# EAGLE board damballah_2.54mm_adapter (EAGLE 5.10)
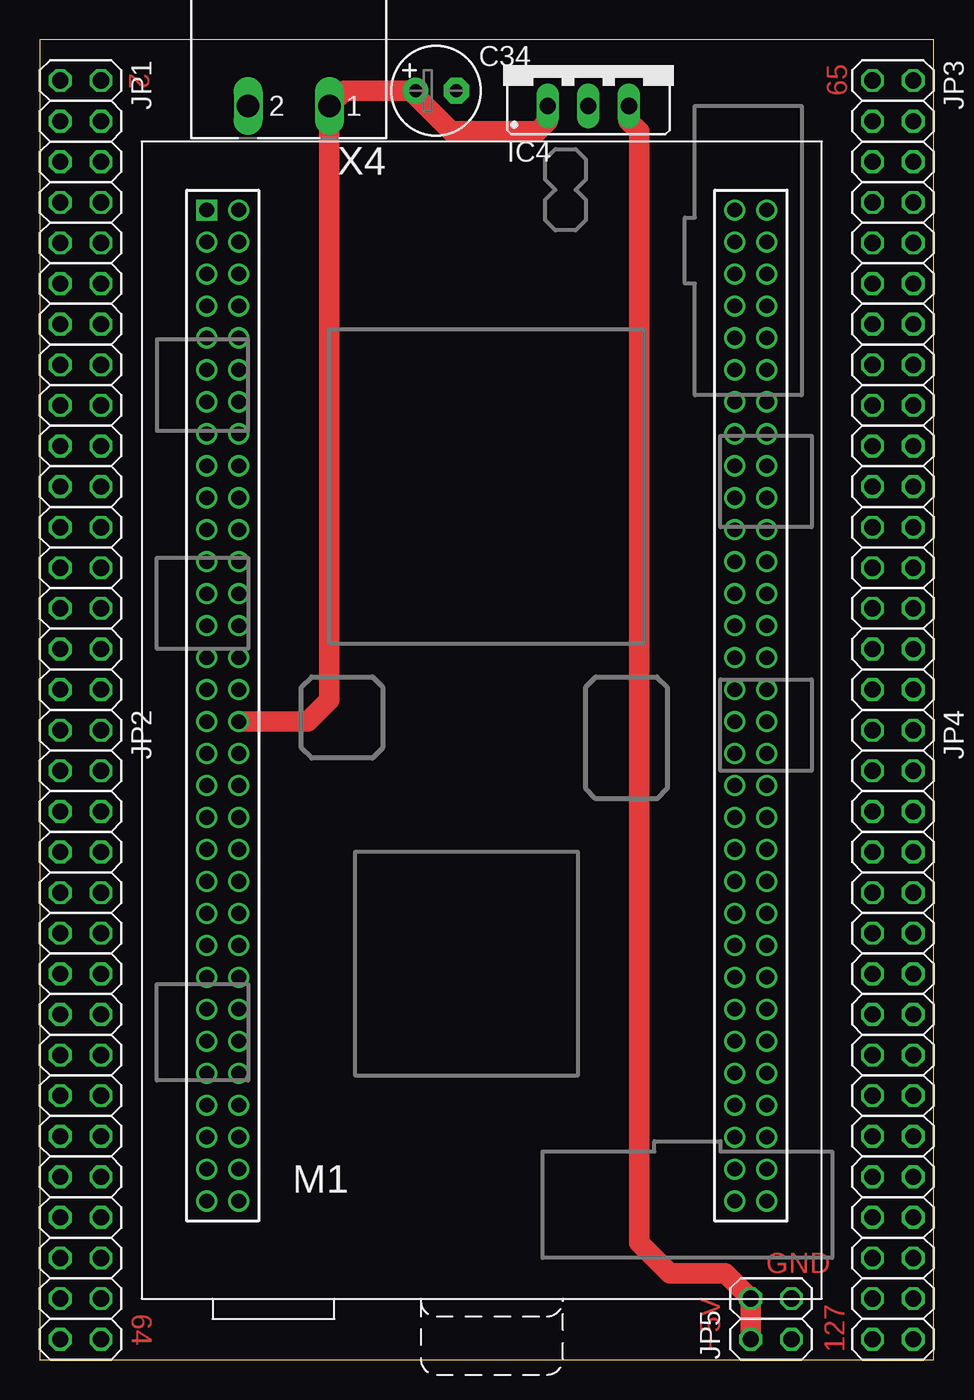
[diagram p0: board, top side]
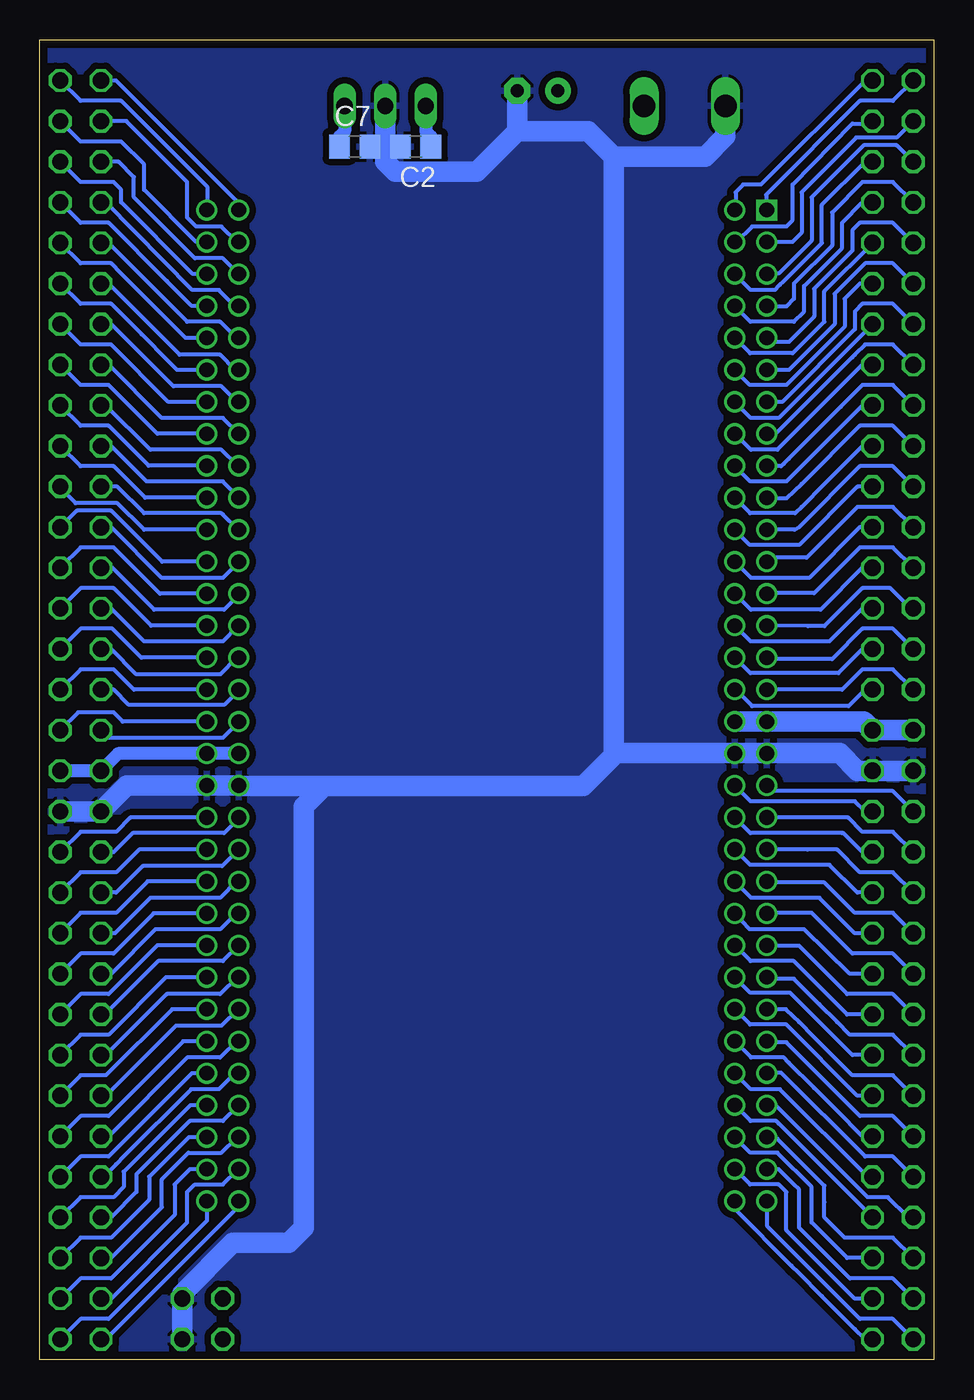
[diagram p1: board, bottom side, seen from below]

Size 55.88 x 82.55 mm. Coordinates in mm from the lower left corner, seen from the top.
Outline: 55.88,0 55.88,82.55 0,82.55 0,0 55.88,0
Copper layers (1*16): Top 0.035mm / dielectric 1.5mm / Bottom 0.035mm
Design rules "PCB-POOL": minimum track width 6mil, minimum drill 12mil, track to track 6mil, track to pad 6mil, pad to pad 6mil, via to via 6mil, smd to smd 6mil, copper to edge 20mil, drill to drill 8mil, minimum pad ring 8mil, minimum via ring 6mil, stop-mask expansion 3mil, vias tented up to drill 0mil, thermal gap 8mil

## Footprints (pad centres in the part's own frame; a part is rotated, then mirrored left to right if it is on the bottom)
C0805 = smd 1.3 x 1.5: 1 -0.95,0; 2 0.95,0
E2,5-6 = drill 0.813 pad 1.6 round: + -1.27,0 | drill 0.813 pad 1.6 octagon: - 1.27,0
78XXS = drill 1.016 long: GND 0,-2.54; IN -2.54,-2.54; OUT 2.54,-2.54
2X16 = drill 1.016 octagon: 1 -19.05,-1.27; 2 -19.05,1.27; 3 -16.51,-1.27; 4 -16.51,1.27; 5 -13.97,-1.27; 6 -13.97,1.27; 7 -11.43,-1.27; 8 -11.43,1.27; 9 -8.89,-1.27; 10 -8.89,1.27; 11 -6.35,-1.27; 12 -6.35,1.27; 13 -3.81,-1.27; 14 -3.81,1.27; 15 -1.27,-1.27; 16 -1.27,1.27; 17 1.27,-1.27; 18 1.27,1.27; 19 3.81,-1.27; 20 3.81,1.27; 21 6.35,-1.27; 22 6.35,1.27; 23 8.89,-1.27; 24 8.89,1.27; 25 11.43,-1.27; 26 11.43,1.27; 27 13.97,-1.27; 28 13.97,1.27; 29 16.51,-1.27; 30 16.51,1.27; 31 19.05,-1.27; 32 19.05,1.27
2X02 = drill 1.016 octagon: 1 -1.27,-1.27; 2 -1.27,1.27; 3 1.27,-1.27; 4 1.27,1.27
CONTROL = drill 0.914 square: 1 4.08,68.1 | drill 0.914 round: 2 6.08,68.1; 3 4.08,66.1; 4 6.08,66.1; 5 4.08,64.1; 6 6.08,64.1; 7 4.08,62.1; 8 6.08,62.1; 9 4.08,60.1; 10 6.08,60.1; 11 4.08,58.1; 12 6.08,58.1; 13 4.08,56.1; 14 6.08,56.1; 15 4.08,54.1; 16 6.08,54.1; 17 4.08,52.1; 18 6.08,52.1; 19 4.08,50.1; 20 6.08,50.1; 21 4.08,48.1; 22 6.08,48.1; 23 4.08,46.1; 24 6.08,46.1; 25 4.08,44.1; 26 6.08,44.1; 27 4.08,42.1; 28 6.08,42.1; 29 4.08,40.1; 30 6.08,40.1; 31 4.08,38.1; 32 6.08,38.1; 33 4.08,36.1; 34 6.08,36.1; 35 4.08,34.1; 36 6.08,34.1; 37 4.08,32.1; 38 6.08,32.1; 39 4.08,30.1; 40 6.08,30.1; 41 4.08,28.1; 42 6.08,28.1; 43 4.08,26.1; 44 6.08,26.1; 45 4.08,24.1; 46 6.08,24.1; 47 4.08,22.1; 48 6.08,22.1; 49 4.08,20.1; 50 6.08,20.1; 51 4.08,18.1; 52 6.08,18.1; 53 4.08,16.1; 54 6.08,16.1; 55 4.08,14.1; 56 6.08,14.1; 57 4.08,12.1; 58 6.08,12.1; 59 4.08,10.1; 60 6.08,10.1; 61 4.08,8.1; 62 6.08,8.1; 63 4.08,6.1; 64 6.08,6.1; 65 37.1,68.1; 66 39.1,68.1; 67 37.1,66.1; 68 39.1,66.1; 69 37.1,64.1; 70 39.1,64.1; 71 37.1,62.1; 72 39.1,62.1; 73 37.1,60.1; 74 39.1,60.1; 75 37.1,58.1; 76 39.1,58.1; 77 37.1,56.1; 78 39.1,56.1; 79 37.1,54.1; 80 39.1,54.1; 81 37.1,52.1; 82 39.1,52.1; 83 37.1,50.1; 84 39.1,50.1; 85 37.1,48.1; 86 39.1,48.1; 87 37.1,46.1; 88 39.1,46.1; 89 37.1,44.1; 90 39.1,44.1; 91 37.1,42.1; 92 39.1,42.1; 93 37.1,40.1; 94 39.1,40.1; 95 37.1,38.1; 96 39.1,38.1; 97 37.1,36.1; 98 39.1,36.1; 99 37.1,34.1; 100 39.1,34.1; 101 37.1,32.1; 102 39.1,32.1; 103 37.1,30.1; 104 39.1,30.1; 105 37.1,28.1; 106 39.1,28.1; 107 37.1,26.1; 108 39.1,26.1; 109 37.1,24.1; 110 39.1,24.1; 111 37.1,22.1; 112 39.1,22.1; 113 37.1,20.1; 114 39.1,20.1; 115 37.1,18.1; 116 39.1,18.1; 117 37.1,16.1; 118 39.1,16.1; 119 37.1,14.1; 120 39.1,14.1; 121 37.1,12.1; 122 39.1,12.1; 123 37.1,10.1; 124 39.1,10.1; 125 37.1,8.1; 126 39.1,8.1; 127 37.1,6.1; 128 39.1,6.1
MSTBA2 = drill 1.397 long: 1 -2.54,5.08; 2 2.54,5.08

## Placement (x,y rotation side)
C2  100n  [C0805]  32.38,75.88 180 bottom
C7  100n  [C0805]  36.2,75.88 0 bottom
C34  22µ  [E2,5-6]  24.77,79.38 0 top
IC4  7805  [78XXS]  34.29,80.96 0 top
JP1  [2X16]  2.54,60.96 270 top
JP2  [2X16]  2.54,20.32 270 top
JP3  [2X16]  53.34,60.96 270 top
JP4  [2X16]  53.34,20.32 270 top
JP5  [2X02]  45.72,2.54 90 top
M1  DAMBALLAH  [CONTROL]  6.35,3.81 0 top
X4  MSTBA2  [MSTBA2]  15.56,83.5 180 top

## Library data of the parts
C2 C7 C34 = rcl
IC4 = v-reg
JP1-JP5 = pinhead2
M1 = loa
X4 = con-phoenix-508

## Nets
+5V: C7.1 IC4.OUT JP5.2 JP5.4
GND: C2.2 C7.2 C34.- IC4.GND JP2.3 JP2.4 JP4.5 JP4.6 JP5.1 JP5.3 M1.35 M1.36 M1.101 M1.102 X4.2
N$1: JP1.1 M1.1
N$2: JP1.2 M1.2
N$3: JP1.3 M1.3
N$4: JP1.4 M1.4
N$5: JP1.5 M1.5
N$6: JP1.6 M1.6
N$7: JP1.7 M1.7
N$8: JP1.8 M1.8
N$9: JP1.9 M1.9
N$10: JP1.10 M1.10
N$11: JP1.11 M1.11
N$12: JP1.12 M1.12
N$13: JP1.13 M1.13
N$14: JP1.14 M1.14
N$15: JP1.15 M1.15
N$16: JP1.16 M1.16
N$17: JP1.17 M1.17
N$18: JP1.18 M1.18
N$19: JP1.19 M1.19
N$20: JP1.20 M1.20
N$21: JP1.21 M1.21
N$22: JP1.22 M1.22
N$23: JP1.23 M1.23
N$24: JP1.24 M1.24
N$25: JP1.25 M1.25
N$26: JP1.26 M1.26
N$27: JP1.27 M1.27
N$28: JP1.28 M1.28
N$29: JP1.29 M1.29
N$30: JP1.30 M1.30
N$31: JP1.31 M1.31
N$32: JP1.32 M1.32
N$37: JP2.5 M1.37
N$38: JP2.6 M1.38
N$39: JP2.7 M1.39
N$40: JP2.9 M1.41
N$41: JP2.11 M1.43
N$42: JP2.13 M1.45
N$43: JP2.15 M1.47
N$44: JP2.17 M1.49
N$45: JP2.8 M1.40
N$46: JP2.10 M1.42
N$47: JP2.12 M1.44
N$48: JP2.14 M1.46
N$49: JP2.16 M1.48
N$50: JP2.18 M1.50
N$51: JP2.19 M1.51
N$52: JP2.20 M1.52
N$53: JP2.21 M1.53
N$54: JP2.22 M1.54
N$55: JP2.23 M1.55
N$56: JP2.24 M1.56
N$57: JP2.25 M1.57
N$58: JP2.26 M1.58
N$59: JP2.27 M1.59
N$60: JP2.28 M1.60
N$61: JP2.29 M1.61
N$62: JP2.30 M1.62
N$63: JP2.31 M1.63
N$64: JP2.32 M1.64
N$65: JP3.1 M1.65
N$66: JP3.2 M1.66
N$67: JP3.3 M1.67
N$68: JP3.4 M1.68
N$69: JP3.5 M1.69
N$70: JP3.6 M1.70
N$71: JP3.7 M1.71
N$72: JP3.8 M1.72
N$73: JP3.9 M1.73
N$74: JP3.10 M1.74
N$75: JP3.11 M1.75
N$76: JP3.12 M1.76
N$77: JP3.13 M1.77
N$78: JP3.14 M1.78
N$79: JP3.15 M1.79
N$80: JP3.16 M1.80
N$81: JP3.17 M1.81
N$82: JP3.18 M1.82
N$83: JP3.19 M1.83
N$84: JP3.20 M1.84
N$85: JP3.21 M1.85
N$86: JP3.22 M1.86
N$87: JP3.23 M1.87
N$88: JP3.24 M1.88
N$89: JP3.25 M1.89
N$90: JP3.26 M1.90
N$91: JP3.27 M1.91
N$92: JP3.28 M1.92
N$93: JP3.29 M1.93
N$94: JP3.30 M1.94
N$95: JP3.31 M1.95
N$96: JP3.32 M1.96
N$97: JP4.1 M1.97
N$98: JP4.2 M1.98
N$99: JP4.3 JP4.4 M1.99 M1.100
N$103: JP4.7 M1.103
N$104: JP4.8 M1.104
N$105: JP4.10 M1.106
N$106: JP4.11 M1.107
N$107: JP4.12 M1.108
N$108: JP4.13 M1.109
N$109: JP4.14 M1.110
N$110: JP4.15 M1.111
N$111: JP4.16 M1.112
N$112: JP4.17 M1.113
N$113: JP4.18 M1.114
N$114: JP4.19 M1.115
N$115: JP4.20 M1.116
N$116: JP4.21 M1.117
N$117: JP4.22 M1.118
N$118: JP4.23 M1.119
N$119: JP4.24 M1.120
N$120: JP4.25 M1.121
N$121: JP4.26 M1.122
N$122: JP4.27 M1.123
N$123: JP4.28 M1.124
N$124: JP4.29 M1.125
N$125: JP4.30 M1.126
N$126: JP4.31 M1.127
N$127: JP4.32 M1.128
N$128: JP4.9 M1.105
VCC: C2.1 C34.+ IC4.IN JP2.1 JP2.2 M1.33 M1.34 X4.1

## Tracks (layer width: path | path; a pad name or v marks a point on that pad's centre or on a via)
+5V
  Top 1.27: JP5.2 JP5.4 42.86,5.4 39.37,5.4 37.47,7.3 37.47,76.83 36.83,77.47 IC4.OUT
  Bottom 0.813: IC4.OUT 36.83,76.83 37.15,76.52 C7.1
GND
  Bottom 0.813: C2.2 34.29,75.88 C7.2 | 10.4,37.94 M1.35 10.45,37.91 10.48,37.94 | 12.4,37.94 M1.36 12.51,37.91 12.54,37.94 | 20,37.94 20,37.78 | 43.42,35.88 M1.101
  Bottom 1.27: IC4.GND 34.29,75.88 34.29,74.93 33.66,74.3 28.57,74.3 26.04,76.83 | X4.2 13.02,76.52 14.29,75.25 20,75.25 | 20,75.25 21.59,76.83 26.04,76.83 | JP2.3 JP2.4 4.76,36.83 5.87,37.94 10.4,37.94 | 10.48,37.94 12.4,37.94 | 12.54,37.94 20,37.94 20,75.25 | M1.101 M1.102 50.45,35.91 JP4.5 JP4.6 | 20,37.78 21.91,35.88 38.1,35.88 | 38.1,35.88 43.42,35.88 | JP5.1 JP5.3 46.99,4.13 43.81,7.3 40.32,7.3 39.37,8.26 39.37,34.61 38.1,35.88 | 26.04,76.83 C34.-
  pour Bottom (isolate 0.406): -1.27,83.82 57.15,83.82 57.15,-1.27 -1.27,-1.27
N$1
  Bottom 0.254: JP1.1 2.54,78.74 4.6,78.74 10.48,72.87 10.48,72.02 M1.1
N$2
  Bottom 0.254: JP1.2 4.29,80.01 10.79,73.5 11.91,73.5 12.38,73.03 12.38,71.96 M1.2
N$3
  Bottom 0.254: M1.3 8.83,69.91 8.26,70.48 8.26,73.03 4.84,76.44 2.3,76.44 JP1.3
N$4
  Bottom 0.254: M1.4 12.32,69.91 11.35,70.88 9.21,70.88 8.81,71.28 8.81,73.5 5.08,77.31 3.97,77.31 JP1.4
N$5
  Bottom 0.254: JP1.5 2.3,75.96 4.37,75.96 7.62,72.71 7.62,70.01 9.68,67.94 10.39,67.94 M1.5
N$6
  Bottom 0.254: JP1.6 4.29,74.93 6.99,72.23 6.99,69.85 9.37,67.47 9.6,67.23 9.92,66.91 11.43,66.91 M1.6
N$7
  Bottom 0.254: JP1.7 2.54,73.66 4.45,73.66 6.35,71.75 6.35,69.69 8.73,67.31 8.73,66.36 9.21,65.88 10.4,65.88 M1.7
N$8
  Bottom 0.254: JP1.8 4.45,72.39 5.71,71.12 5.71,69.53 8.1,67.15 8.1,65.56 8.73,64.93 11.45,64.93 M1.8
N$9
  Bottom 0.254: JP1.9 2.54,71.12 4.6,71.12 5.08,70.64 5.08,69.37 7.46,66.99 7.46,65.25 9.05,63.66 10.18,63.66 M1.9
N$10
  Bottom 0.254: JP1.10 | JP1.10 6.83,66.83 6.83,64.93 8.73,63.02 | 8.73,63.02 | 8.73,63.02 8.81,62.94 11.46,62.94 M1.10
N$11
  Bottom 0.254: JP1.11 2.54,68.58 4.29,68.58 6.19,66.67 6.19,64.77 9.05,61.91 M1.11
N$12
  Bottom 0.254: JP1.12 4.6,67.31 5.56,66.36 5.56,64.61 9.21,60.96 11.48,60.96 M1.12
N$13
  Bottom 0.254: JP1.13 2.54,66.04 4.45,66.04 4.92,65.56 4.92,64.45 9.46,59.91 M1.13
N$14
  Bottom 0.254: JP1.14 5.71,62.87 | 5.71,62.87 | 5.71,62.87 9.68,58.9 11.42,58.9 M1.14
N$15
  Bottom 0.254: JP1.15 2.54,63.5 4.29,63.5 4.92,62.87 5.08,62.71 9.88,57.91 M1.15
N$16
  Bottom 0.254: M1.16 11.43,56.91 9.76,56.91 4.45,62.23 JP1.16 | JP1.16
N$17
  Bottom 0.254: JP1.17 2.54,60.96 4.45,60.96 5.79,59.61 9.05,56.36 9.37,56.04 9.53,55.88 10.48,55.88 M1.17
N$18
  Bottom 0.254: JP1.18 4.45,59.69 9.21,54.93 11.45,54.93 M1.18
N$19
  Bottom 0.254: JP1.19 2.54,58.42 4.6,58.42 8.26,54.77 9.21,53.86 10.37,53.86 10.48,53.98 M1.19
N$20
  Bottom 0.254: JP1.20 4.45,57.15 6.83,54.77 8.26,53.34 8.65,52.94 11.46,52.94 M1.20
N$21
  Bottom 0.254: JP1.21 2.54,55.88 4.6,55.88 8.41,52.07 8.68,51.91 M1.21
N$22
  Bottom 0.254: JP1.22 4.76,54.61 8.41,50.96 11.48,50.96 M1.22
N$23
  Bottom 0.254: JP1.23 2.54,53.34 4.76,53.34 7.94,50.16 10.32,50.16 10.48,50.01 M1.23
N$24
  Bottom 0.254: JP1.24 4.6,52.07 7.78,48.9 11.41,48.9 M1.24
N$25
  Bottom 0.254: JP1.25 2.54,50.8 4.6,50.8 7.46,47.94 10.48,47.94 M1.25
N$26
  Bottom 0.254: JP1.26 4.45,49.53 7.06,46.91 11.43,46.91 M1.26
N$27
  Bottom 0.254: JP1.27 1.43,46.99 2.7,48.26 4.45,48.26 6.83,45.88 7.86,45.88 M1.27
N$28
  Bottom 0.254: JP1.28 4.45,46.99 6.51,44.93 11.45,44.93 M1.28
N$29
  Bottom 0.254: JP1.29 2.54,45.72 4.45,45.72 6.35,43.81 10.32,43.81 M1.29
N$30
  Bottom 0.254: JP1.30 4.45,44.45 5.95,42.94 11.46,42.94 M1.30
N$31
  Bottom 0.254: JP1.31 2.54,43.18 4.45,43.18 5.71,41.91 M1.31
N$32
  Bottom 0.254: M1.32 12.38,41.91 11.35,40.88 5.32,40.88 4.29,41.91 JP1.32
N$37
  Bottom 0.254: JP2.5 2.54,35.56 10.16,35.56 10.48,35.88 M1.37
N$38
  Bottom 0.254: JP2.6 4.29,34.29 4.92,34.92 11.45,34.92 M1.38
N$39
  Bottom 0.254: M1.39 5.33,33.91 4.45,33.02 2.54,33.02 JP2.7
N$40
  Bottom 0.254: JP2.9 2.54,30.48 4.6,30.48 6.03,31.91 7.89,31.91 M1.41
N$41
  Bottom 0.254: JP2.11 2.54,27.94 4.92,27.94 6.83,29.84 10.48,29.84 M1.43
N$42
  Bottom 0.254: JP2.13 2.54,25.4 5.08,25.4 7.62,27.94 10.48,27.94 M1.45
N$43
  Bottom 0.254: JP2.15 2.54,22.86 5.4,22.86 8.41,25.88 10.32,25.88 M1.47
N$44
  Bottom 0.254: JP2.17 2.54,20.32 5.24,20.32 6.03,21.11 7.14,22.23 8.57,23.65 8.73,23.81 10.32,23.81 M1.49
N$45
  Bottom 0.254: JP2.8 4.45,31.75 5.64,32.94 5.71,32.94 | 5.71,32.94 | 5.71,32.94 11.46,32.94 M1.40
N$46
  Bottom 0.254: JP2.10 4.76,29.21 6.51,30.96 11.48,30.96 M1.42
N$47
  Bottom 0.254: JP2.12 4.92,26.67 7.14,28.89 11.41,28.89 M1.44
N$48
  Bottom 0.254: JP2.14 5.24,24.13 8.1,26.91 11.51,26.91 M1.46
N$49
  Bottom 0.254: JP2.16 5.4,21.59 8.73,24.92 11.44,24.92 M1.48
N$50
  Bottom 0.254: JP2.18 5.08,19.05 8.97,22.94 11.46,22.94 M1.50
N$51
  Bottom 0.254: JP2.19 2.54,17.78 5.08,17.78 5.87,18.57 6.43,19.13 7.46,20.16 8.41,21.11 8.73,21.43 9.24,21.91 M1.51
N$52
  Bottom 0.254: JP2.20 4.76,16.51 9.21,20.95 11.47,20.95 M1.52
N$53
  Bottom 0.254: JP2.21 2.54,15.24 4.6,15.24 9.21,19.84 10.48,19.84 M1.53
N$54
  Bottom 0.254: JP2.22 4.45,13.97 6.03,15.56 6.19,15.72 7.46,16.99 9.05,18.57 9.37,18.89 11.41,18.89 M1.54
N$55
  Bottom 0.254: JP2.23 2.54,12.7 4.29,12.7 9.53,17.94 10.4,17.94 M1.55
N$56
  Bottom 0.254: JP2.24 4.13,11.43 9.6,16.91 11.43,16.91 M1.56
N$57
  Bottom 0.254: JP2.25 1.59,8.89 2.86,10.16 4.13,10.16 9.84,15.88 10.39,15.88 M1.57
N$58
  Bottom 0.254: JP2.26 9.68,14.76 | 9.68,14.76 | 9.68,14.76 9.84,14.92 11.44,14.92 M1.58
N$59
  Bottom 0.254: JP2.27 2.54,7.62 5.56,7.62 6.83,8.89 6.83,9.84 6.83,10.88 9.76,13.81 10.33,13.81 M1.59
N$60
  Bottom 0.254: JP2.28 5.4,6.35 7.62,8.57 7.62,10.79 9.76,12.94 11.46,12.94 M1.60
N$61
  Bottom 0.254: JP2.29 2.54,5.08 5.24,5.08 8.41,8.26 8.41,10.64 8.73,10.95 9.68,11.91 M1.61
N$62
  Bottom 0.254: JP2.30 4.92,3.81 9.21,8.1 9.21,10.48 9.68,10.95 11.47,10.95 M1.62
N$63
  Bottom 0.254: JP2.31 2.54,2.54 4.6,2.54 10.4,8.33 10.4,9.92 10.32,10.08 10.32,10 10.34,10 M1.63
N$64
  Bottom 0.254: JP2.32 4.29,1.27 4.92,1.91 6.99,3.97 8.41,5.4 8.89,5.87 12.38,9.37 12.38,9.86 M1.64
N$65
  Bottom 0.254: M1.65 43.49,71.91 43.5,72.39 51.12,80.01 JP3.1
N$66
  Bottom 0.254: M1.66 45.56,71.91 45.4,72.08 45.4,73.34 46.51,74.45 48.58,76.52 50.8,78.74 53.34,78.74 JP3.2
N$67
  Bottom 0.254: M1.67 43.56,69.91 44.53,70.88 46.12,70.88 46.67,71.44 46.67,73.66 50.48,77.47 JP3.3
N$68
  Bottom 0.254: M1.68 46.1,69.91 49.37,73.18 49.37,74.77 50.8,76.2 53.34,76.2 JP3.4
N$69
  Bottom 0.254: M1.69 43.46,67.91 44.45,68.9 46.2,68.9 50.01,72.71 50.01,73.98 50.96,74.93 JP3.5
N$70
  Bottom 0.254: M1.70 46.32,67.91 50.8,72.39 50.8,73.18 51.28,73.66 53.34,73.66 JP3.6
N$71
  Bottom 0.254: M1.71 43.69,65.91 44.69,66.91 46.35,66.91 51.75,72.39 JP3.7 | JP3.7
N$72
  Bottom 0.254: M1.72 46.38,65.91 47.94,67.47 51.59,71.12 53.34,71.12 JP3.8
N$73
  Bottom 0.254: M1.73 43.59,63.91 44.61,64.93 46.67,64.93 48.9,67.15 50.16,68.42 51.59,69.85 JP3.9
N$74
  Bottom 0.254: M1.74 46.77,63.91 49.85,66.99 50.8,67.94 51.44,68.58 53.34,68.58 JP3.10
N$75
  Bottom 0.254: M1.75 43.65,61.91 44.61,62.87 47.15,62.87 51.59,67.31 JP3.11
N$76
  Bottom 0.254: M1.76 47.3,61.91 47.78,62.39 49.53,64.14 51.44,66.04 53.34,66.04 JP3.12
N$77
  Bottom 0.254: M1.77 43.56,59.91 44.45,60.8 | 44.45,60.8 | 44.45,60.8 44.53,60.88 47.55,60.88 51.44,64.77 JP3.13
N$78
  Bottom 0.254: M1.78 47.84,59.91 51.44,63.5 53.34,63.5 JP3.14
N$79
  Bottom 0.254: M1.79 43.46,57.91 44.45,58.9 48.26,58.9 51.59,62.23 JP3.15
N$80
  Bottom 0.254: M1.80 48.54,57.91 51.59,60.96 53.34,60.96 JP3.16
N$81
  Bottom 0.254: M1.81 43.53,55.91 44.53,56.91 48.97,56.91 51.75,59.69 JP3.17
N$82
  Bottom 0.254: M1.82 49.08,55.91 51.59,58.42 53.34,58.42 JP3.18
N$83
  Bottom 0.254: M1.83 43.45,53.93 44.45,54.93 49.21,54.93 51.44,57.15 JP3.19
N$84
  Bottom 0.254: M1.84 49.31,53.91 51.28,55.88 53.34,55.88 JP3.20
N$85
  Bottom 0.254: M1.85 43.5,51.91 44.45,52.86 | 44.45,52.86 | 44.45,52.86 44.53,52.94 49.37,52.94 51.04,54.61 JP3.21
N$86
  Bottom 0.254: M1.86 49.37,51.91 51.04,53.58 53.66,53.58 54.61,54.53 JP3.22
N$87
  Bottom 0.254: M1.87 43.45,49.9 44.45,48.9 48.26,48.9 51.44,52.07 JP3.23
N$88
  Bottom 0.254: M1.88 48.24,49.91 51.44,53.1 53.58,53.1 JP3.24
N$89
  Bottom 0.254: M1.89 43.45,47.83 44.29,46.99 | 44.29,46.99 | 44.29,46.99 44.37,46.91 48.74,46.91 51.36,49.53 JP3.25
N$90
  Bottom 0.254: M1.90 48.39,47.91 51.28,50.8 53.34,50.8 JP3.26
N$91
  Bottom 0.254: M1.91 43.47,45.91 44.45,44.93 49.37,44.93 51.44,46.99 JP3.27
N$92
  Bottom 0.254: M1.92 48.93,45.91 51.28,48.26 53.34,48.26 JP3.28
N$93
  Bottom 0.254: M1.93 43.56,43.91 44.61,42.86 49.85,42.86 51.44,44.45 JP3.29
N$94
  Bottom 0.254: M1.94 49.55,43.91 51.36,45.72 53.34,45.72 JP3.30
N$95
  Bottom 0.254: M1.95 43.45,41.88 44.37,40.96 50.32,40.96 51.28,41.91 JP3.31
N$96
  Bottom 0.254: M1.96 50.01,41.91 51.12,43.02 51.28,43.18 53.34,43.18 JP3.32
N$97
  Bottom 0.254: M1.97 43.45,39.89 44.45,38.89 51.59,38.89 JP4.1
N$98
  Bottom 0.254: M1.98 50.7,39.91 51.28,40.48 53.5,40.48 JP4.2
N$99
  Bottom 0.813: M1.99 M1.100 50.99,37.91 JP4.3 JP4.4
N$103
  Bottom 0.254: M1.103 43.45,33.86 44.29,33.02 | 44.29,33.02 | 44.29,33.02 44.37,32.94 50.09,32.94 51.28,31.75 JP4.7
N$104
  Bottom 0.254: M1.104 50.23,33.91 51.12,33.02 53.34,33.02 JP4.8
N$105
  Bottom 0.254: M1.106 49.69,31.91 51.12,30.48 53.34,30.48 JP4.10
N$106
  Bottom 0.254: M1.107 43.59,29.91 44.61,28.89 48.97,28.89 51.2,26.67 JP4.11
N$107
  Bottom 0.254: M1.108 49.15,29.91 51.12,27.94 53.34,27.94 JP4.12
N$108
  Bottom 0.254: M1.109 43.61,27.91 44.61,26.91 48.66,26.91 51.44,24.13 JP4.13
N$109
  Bottom 0.254: M1.110 48.77,27.91 51.28,25.4 53.34,25.4 JP4.14
N$110
  Bottom 0.254: M1.111 43.46,25.91 44.45,24.92 48.5,24.92 48.66,24.77 51.83,21.59 JP4.15
N$111
  Bottom 0.254: M1.112 48.54,25.91 51.59,22.86 53.34,22.86 JP4.16
N$112
  Bottom 0.254: M1.113 43.56,23.91 44.61,22.86 47.94,22.86 51.75,19.05 JP4.17
N$113
  Bottom 0.254: M1.114 48,23.91 51.59,20.32 53.34,20.32 JP4.18
N$114
  Bottom 0.254: M1.115 43.49,21.91 44.53,20.88 47.39,20.88 51.75,16.51 JP4.19
N$115
  Bottom 0.254: M1.116 47.62,21.91 51.75,17.78 53.34,17.78 JP4.20
N$116
  Bottom 0.254: M1.117 43.59,19.91 44.53,18.97 | 44.53,18.97 | 44.53,18.97 44.61,18.89 46.67,18.89 51.59,13.97 JP4.21
N$117
  Bottom 0.254: M1.118 46.92,19.91 51.59,15.24 53.34,15.24 JP4.22
N$118
  Bottom 0.254: M1.119 43.69,17.91 44.61,16.99 | 44.61,16.99 | 44.61,16.99 44.69,16.91 46.43,16.91 50.64,12.7 51.12,12.22 51.91,11.43 JP4.23
N$119
  Bottom 0.254: M1.120 46.38,17.91 51.59,12.7 53.34,12.7 JP4.24
N$120
  Bottom 0.254: M1.121 43.46,15.91 44.45,14.92 46.51,14.92 49.85,11.59 49.85,10.48 51.44,8.89 JP4.25
N$121
  Bottom 0.254: M1.122 46.48,15.91 50.64,11.75 50.64,10.79 51.28,10.16 53.34,10.16 JP4.26
N$122
  Bottom 0.254: M1.123 43.56,13.91 44.53,12.94 46.59,12.94 48.26,11.27 48.26,9.53 51.44,6.35 JP4.27
N$123
  Bottom 0.254: M1.124 46.57,13.91 49.05,11.43 49.05,10 51.44,7.62 53.34,7.62 JP4.28
N$124
  Bottom 0.254: M1.125 43.49,11.91 44.45,10.95 46.2,10.95 46.67,10.48 46.67,8.57 51.44,3.81 JP4.29
N$125
  Bottom 0.254: M1.126 46.51,11.91 47.47,10.95 47.47,9.05 51.44,5.08 53.34,5.08 JP4.30
N$126
  Bottom 0.254: M1.127 43.45,9.89 43.5,9.53 51.75,1.27 JP4.31
N$127
  Bottom 0.254: M1.128 45.45,8.68 51.59,2.54 53.34,2.54 JP4.32
N$128
  Bottom 0.254: JP4.9 51.12,29.21 49.45,30.88 44.48,30.88 M1.105
VCC
  Top 0.813: M1.34 12.45,39.93
  Top 1.27: IC4.IN 31.75,77.47 31.11,76.83 25.72,76.83 23.5,79.06 C34.+ 19.05,79.38 X4.1 18.1,41.27 16.75,39.93 12.45,39.93
  Bottom 0.813: IC4.IN 31.75,76.83 31.43,76.52 C2.1 | 10.41,39.93 M1.33 10.43,39.96 10.48,39.93 | M1.34 12.48,39.91 12.38,39.93
  Bottom 1.27: JP2.1 JP2.2 4.37,39.93 10.41,39.93 | 10.48,39.93 12.38,39.93

## Text on the board
Top: 2 | 65 | GND | 64 | +5V | 127